# Altium PCB Motor_PCB.PcbDoc
Units mm, origin at the board's own origin, x right, y up, seen from the top; angles counter-clockwise.
Board outline 162.5 x 127.5 mm, 2 copper layers (Top Layer, Bottom Layer), stack 0.372 mm thick; 39 components, 32 nets, 119 pads, 64 vias.
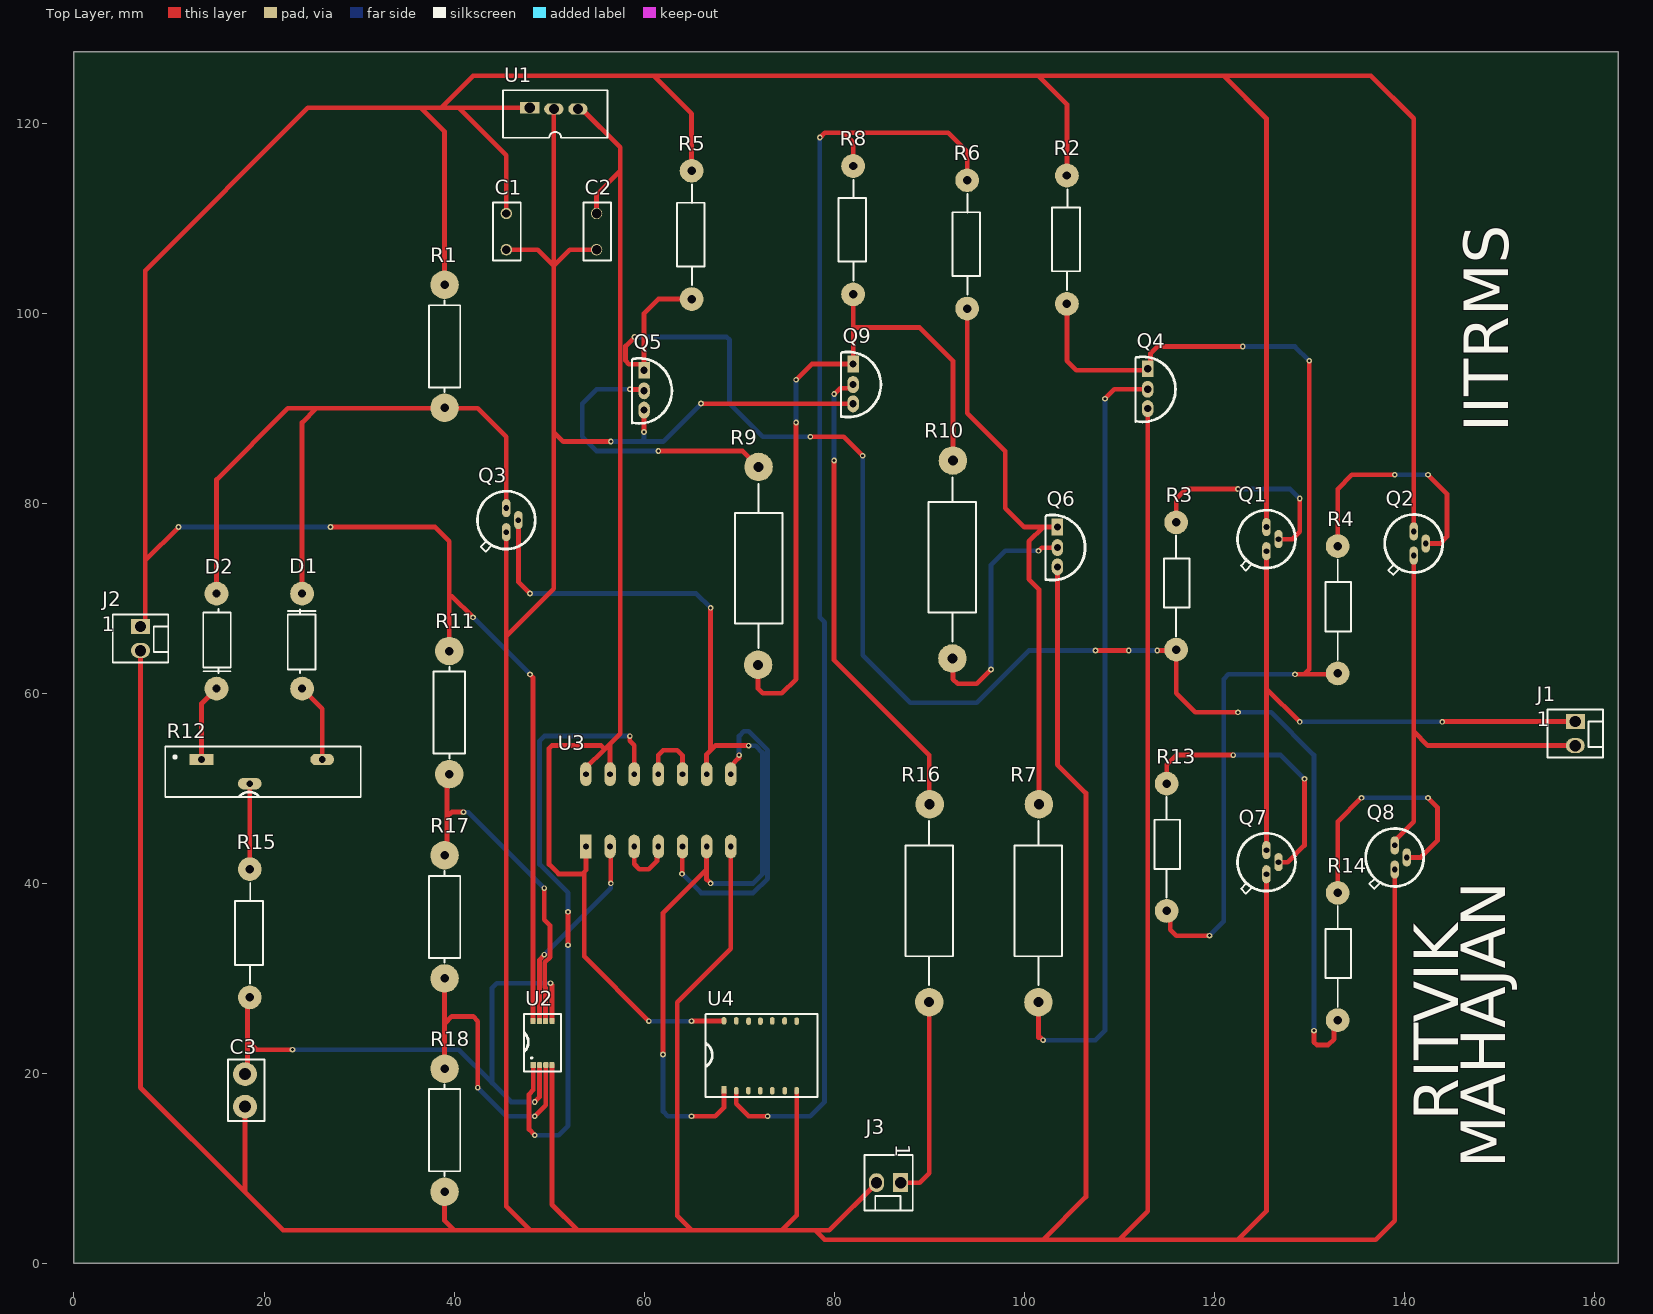
[diagram p0: Top Layer view]
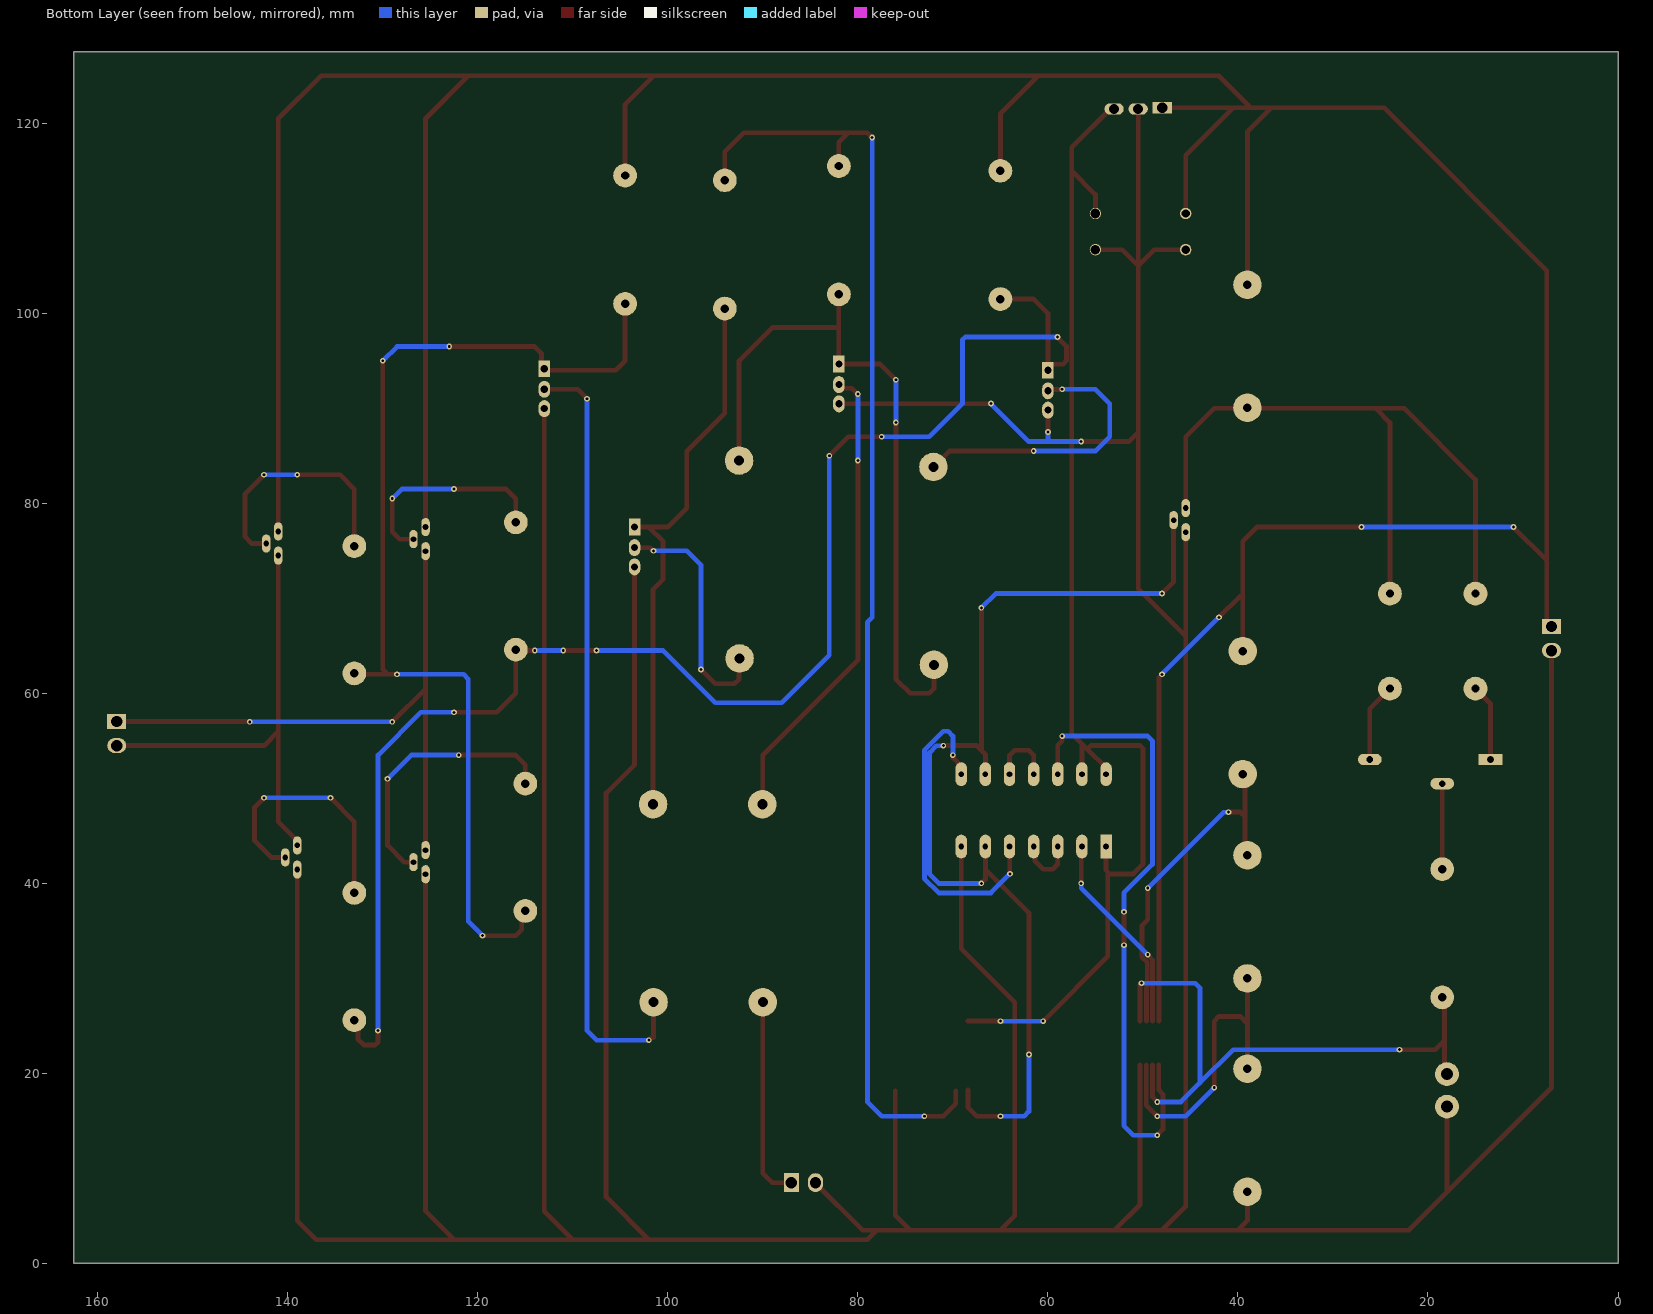
[diagram p1: Bottom Layer view, seen from below]
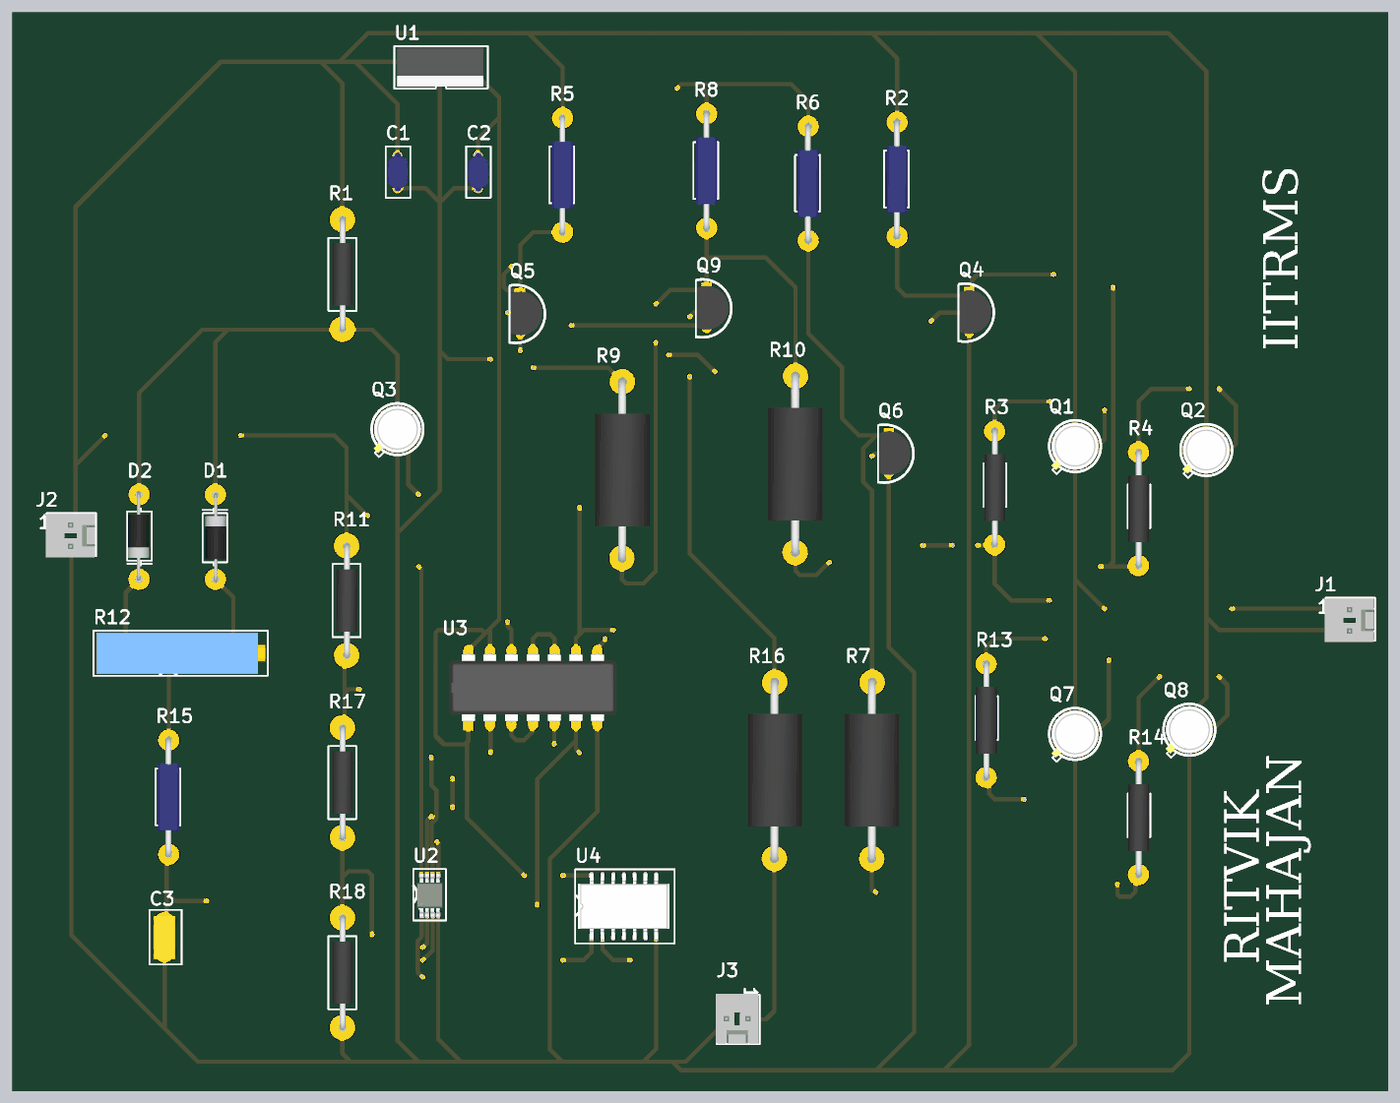
[diagram p2: 3D render of the assembled board from above, using the file's embedded part models]

## Layer stack, top to bottom
Top Solder: solder mask 0.01, Solder Resist, Dk 3.5
Top Layer: signal copper 0.036
Dielectric 1: dielectric 0.3, FR-4, Dk 4.8
Bottom Layer: signal copper 0.036
Bottom Solder: solder mask 0.01, Solder Resist, Dk 3.5

## Board outline
0,0 162.5,0 162.5,127.5 0,127.5

## Design rules (kind name [scope] priority, off if disabled: settings)
Clearance [All] p1: gap=0.05 ignorepadtopadclearanceinfootprint=FALSE
HoleToHoleClearance [All] p1: gap=0.05 allowstackedmicrovias=TRUE
MinimumSolderMaskSliver [All] p1: minsoldermaskwidth=0.05
PolygonConnect [All] p1: connectstyle=Relief reliefconductorwidth=0.254 reliefentries=4 polygonreliefangle="90 Angle" airgapwidth=0.254
RoutingVias [All] p1: holewidth=0.3 width=0.6 viastyle="Through Hole" minholewidth=0.3 minwidth=0.6 maxholewidth=0.3 maxwidth=0.6
SilkToSilkClearance [All] p1: silktosilkclearance=0.05
SilkToSolderMaskClearance [IsPad] p1: minsilkscreentomaskgap=0.03 clearancetoexposedcopper=TRUE
SolderMaskExpansion [All] p1: expansion=0.102 istentingtop=FALSE
Width [All] p1: maxlimit=1 minlimit=0.3 preferedwidth=0.5
26 further rules are at their usual default settings.

## Components (designator, comment, footprint, x,y, rotation, side; value= is the part's Value field where it differs from the comment)
C1 "100uf" 100UF 45.5,110.5 r270 top
C2 "10uf" 10UF 55,106.69 r90 top
C3 "0.1uf" 0.1UF 18,16.5 r90 top
D1 "Diode" DIODE 24,70.5 r270 top
D2 "Diode" DIODE 15,60.5 r90 top
J1 "1x2 Header" HDR1X2 158,57.04 r0 top
J2 "1x2 Header" HDR1X2 7,67.04 r0 top
J3 "1x2 Header" HDR1X2 87,8.5 r270 top
Q1 "BJT" BJT 125.5,77.5 r270 top
Q2 "BJT" BJT 141,77.04 r270 top
Q3 "BJT" BJT 45.5,79.5 r270 top
Q4 "MOSFET" MOSFET 113,94.159 r270 top
Q5 "MOSFET" MOSFET 60,94 r270 top
Q6 "MOSFET" MOSFET 103.5,77.5 r270 top
Q7 "BJT" BJT 125.5,43.5 r270 top
Q8 "BJT" BJT 139,44 r270 top
Q9 "MOSFET" MOSFET 82,94.659 r270 top
R1 "5kr" 5KR 39,90.046 r90 top
R2 "100r" 100R 104.5,101 r90 top
R3 "10kr" 10KR 116,64.6 r90 top
R4 "10kr" 10KR 133,62.1 r90 top
R5 "100r" 100R 65,101.5 r90 top
R6 "100r" 100R 94,100.5 r90 top
R7 "1kr" 1KR 101.5,26.636 r90 top
R8 "100r" 100R 82,102 r90 top
R9 "1kr" 1KR 72.051,84.692 r270 top
R10 "1kr" 1KR 92.449,62.808 r90 top
R11 "5kr" 5KR 39.5,51.5 r90 top
R12 "100kr" POT 13.42,53.167 r0 top
R13 "10kr" 10KR 115,37.1 r90 top
R14 "10kr" 10KR 133,25.6 r90 top
R15 "100r" 100R 18.5,28 r90 top
R16 "1kr" 1KR 90,26.636 r90 top
R17 "5kr" 5KR 39,30 r90 top
R18 "5kr" 5KR 39,7.546 r90 top
U1 "V_Reg" V_REG 47.96,121.627 r0 top
U2 "Comparator" COMP 48.34,20.903 r90 top
U3 "NAND" NAND 53.88,43.88 r90 top
U4 "NOT" NOT 68.409,18.261 r90 top

## Footprints (in the part's own frame and the unit in brackets; to place one, negate y for a bottom-side part, rotate by r counter-clockwise, add the part's x,y. Pads: shape width x height; smd on the part's side, far side on the other; paste and mask are expansions set on the pad)
0.1UF [mm]
  round 2.5 hole 1.27: 1(0,0) 2(3.429,0)
  silkscreen extent -1.52,-2.03 4.95,1.78, body extent -1.26,-1.28 4.56,1.27, height 5.09
1KR [mil]
  round 118.11 hole 42: 1(34,0) 2(854,-2)
  silkscreen extent 105,-98 785,98, body extent 16,-128 874,127, height 255
5KR [mm]
  round 3 hole 0.889: 1(0,0) 2(12.954,0)
  silkscreen extent 1.65,-1.65 11.3,1.65, body extent -0.29,-1.27 13.25,1.21, height 2.48
10KR [mm]
  round 2.5 hole 0.889: 1(0,0) 2(13.4,0)
  silkscreen extent 1.4,-1.4 12,1.27, body extent -0.29,-1.27 13.75,1.21, height 2.48
10UF [mm]
  round 1.2 hole 1.016: 1(0,0) 2(3.81,0)
  silkscreen extent -1.14,-1.52 4.95,1.4, body extent -0.92,-1.27 4.73,1.18, height 4
100R [mm]
  round 2.5 hole 0.889: 1(0,0) 2(13.5,0)
  silkscreen extent 1.45,-1.37 12.04,1.55, body extent -0.32,-1.21 13.83,1.27, height 2.48
100UF [mm]
  round 1.2 hole 0.889: 1(0,0) 2(3.81,0)
  silkscreen extent -1.14,-1.4 4.95,1.52, body extent -0.92,-1.18 4.73,1.27, height 4
BJT [mm]
  oval 1.905x0.889 hole 0.6: 1(0,0) 2(1.27,1.27) 3(2.54,0)
  silkscreen extent -1.78,-3.04 4.57,3.05, body extent -1.52,-2.8 4.08,2.8, height 4.6
COMP [mm]
  rect 0.65x0.55 smd: 1(0,0)
  rrect50% 0.65x0.55 smd: 2(-0.025,-0.66) 3(-0.025,-1.321) 4(-0.025,-1.956) 5(4.597,-1.981) 6(4.597,-1.295) 7(4.597,-0.66) 8(4.597,0.025)
  silkscreen extent -0.71,-2.9 5.36,0.97, body extent -0.27,-2.46 4.79,0.53, height 1.09
DIODE [mm]
  round 2.5 hole 0.87: 1(0,0) 2(10,0)
  silkscreen extent 1.65,-1.5 8.38,1.4, body extent -0.18,-1.2 10.38,1.3, height 2.5
HDR1X2 [mm]
  rect 2x1.6 hole 1.2: 1(0,0)
  oval 2x1.6 hole 1.2: 2(0,-2.54)
  silkscreen extent -2.92,-3.81 2.92,1.27, body extent -3.01,-3.94 2.79,1.14, height 11.71
MOSFET [mil]
  rect 70x47.24 hole 30: 1(0,0)
  oval 70x47.24 hole 30: 2(85,0) 3(165,0)
  silkscreen extent -50,-50 220,115, body extent -31,-43 196,102, height 210
NAND [mm]
  rect 2.5x1.2 hole 0.6: 1(0,0)
  oval 2.5x1.2 hole 0.6: 2(0,-2.54) 3(0,-5.08) 4(0,-7.62) 5(0,-10.16) 6(0,-12.7) 7(0,-15.24) 8(7.62,-15.24) 9(7.62,-12.7) 10(7.62,-10.16) 11(7.62,-7.62) 12(7.62,-5.08) 13(7.62,-2.54) 14(7.62,0)
  body extent -0.13,-17.46 7.75,2.22, height 5.08
NOT [mm]
  rect 0.8x0.5 smd: 1(0,0)
  oval 0.8x0.5 smd: 2(-0.076,-1.295) 3(-0.076,-2.565) 4(-0.076,-3.81) 5(-0.076,-5.08) 6(-0.076,-6.401) 7(-0.076,-7.645) 8(7.239,-7.645) 9(7.264,-6.375) 10(7.264,-5.08) 11(7.239,-3.835) 12(7.239,-2.591) 13(7.264,-1.295) 14(7.264,0)
  silkscreen extent -0.76,-9.83 7.98,1.93, body extent -0.31,-9.23 7.49,1.57, height 1.6
POT [mm]
  rect 2.5x1.2 hole 0.7: 1(0,-0.127)
  oval 2.5x1.2 hole 0.7: 2(5.08,-2.667) 3(12.7,-0.127)
  silkscreen extent -3.81,-4.06 16.76,1.25, body extent -3.43,-3.81 16.51,1.02, height 6.35
V_REG [mil]
  rect 80x47.24 hole 42: 1(0,0)
  oval 80x47.24 hole 42: 2(100,-5) 3(200,-5)
  silkscreen extent -111,-124 323,73, body extent -98,-115 302,65, height 734

## Part data
C1: library part FK22Y5V1A107Z, "CAP CER 100UF 10V Y5V RADIAL", Capacitance=100uF, Case/Package=Radial, Dielectric=Y5V, Manufacturer=TDK, Max Operating Temperature=85°C, Min Operating Temperature=-30°C, Package Quantity=500, Tolerance=80%, Voltage Rating=10V, Category="Ceramic Capacitors", ComponentLink1Description=https://datasheet.ciiva.com/160/leadmlcc-commercial-general-en-160679.pdf?src-supplier=Digi-Key, ComponentLink1URL=https://datasheet.ciiva.com/160/leadmlcc-commercial-general-en-160679.pdf?src-supplier=Digi-Key, Height=8mm, Height - Seated (Max)=0.315inch, Lead Free="Lead Free", Lead Length=7mm, Lead Pitch=5mm, Lead/Base Style=Kinked, Length=0.295inch, Manufacturer Part Number=FK22Y5V1A107Z, Mount="Through Hole", Packaging=Bulk, Radiation Hardening=No, RoHS=Yes, RoHS Compliant=Yes, Series=FK, Supplier 1=Avnet, Supplier Part Number 1=FK22Y5V1A107Z, Termination=Radial, Voltage Rating (DC)=10V, Width=0.157inch
C2: library part FK20X7R1E106MR000, "Cap Ceramic 10uF 25V X7R 20% Radial 5mm 125°C Bulk", Case/Package=Radial, Manufacturer=TDK, Supplier Part Number 1=445-FK20X7R1E106MR000-ND, Category="Ceramic Capacitors", ComponentLink1Description=http://product.tdk.com/en/catalog/datasheets/leadmlcc_commercial_general_en.pdf?src-supplier=Avnet, ComponentLink1URL=http://product.tdk.com/en/catalog/datasheets/leadmlcc_commercial_general_en.pdf?src-supplier=Avnet, Manufacturer Part Number=FK20X7R1E106MR000, Pricing 1="1=0.87000, 10=0.64200, 50=0.51340, 100=0.44010, 500=0.34840, 1000=0.29339, 2500=0.27506, 5000=0.25672 (USD)", Stock 1=500, Supplier 1=DigiKey
C3: library part M39014/01-1553, "Cap Ceramic 0.1uF 50V X7R 10% Radial 5.08mm (0.01%FR) 125°C Bulk", Capacitance=100nF, Case/Package=Radial, Dielectric=X7R, Manufacturer=KEMET, Max Operating Temperature=125°C, Min Operating Temperature=-55°C, Package Quantity=100, Supplier Part Number 1=1001-2186-ND, Tolerance=10%, Voltage Rating=50V, Category="Ceramic Capacitors", ComponentLink1Description=http://components.arrow.com/part/dataview/4268595S5964331N4387?src-supplier=Arrow+Electronics, ComponentLink1URL=http://components.arrow.com/part/dataview/4268595S5964331N4387?src-supplier=Arrow+Electronics, ComponentLink2Description=http://www.kemet.com/docfinder?Partnumber=C052T104K5X5CR&src-supplier=Digi-Key, ComponentLink2URL=http://www.kemet.com/docfinder?Partnumber=C052T104K5X5CR&src-supplier=Digi-Key, Construction=RADIAL, Depth=2.29mm, Failure Rate=0.01%, Features=Military, Height - Seated (Max)=0.2inch, Lead Pitch=0.2inch, Lead/Base Style="Formed Leads", Length=0.19inch, Manufacturer Part Number=M39014/01-1553, Mount="Through Hole", Packaging=Bulk, Pricing 1="1=1.75000, 10=1.38200, 50=1.19780, 100=1.03650, 500=0.78316, 1000=0.69102, 2500=0.64495, 5000=0.62192 (USD)", RoHS=No, RoHS Compliant=No, Series="Military, MIL-PRF-39014, CKR05", Stock 1=21269, Supplier 1=Digi-Key, Width=0.09inch
D1 D2: library part 1N4001G-T, "DIODE GEN PURP 50V 1A DO41", Average Rectified Current=1A, Capacitance=8pF, Case/Package=DO-41, Forward Voltage=1V, Manufacturer=Diodes, Max Operating Temperature=175°C, Max Repetitive Reverse Voltage (Vrrm)=50V, Max Reverse Current=5uA, Max Surge Current=30A, Min Operating Temperature=-65°C, Package Quantity=5000, Supplier Part Number 1=1N4001GDICT-ND, Category="Rectifier Diodes", ComponentLink1Description=https://datasheet.ciiva.com/4453/ds29002-87001-4453648.pdf?src-supplier=Mouser, ComponentLink1URL=https://datasheet.ciiva.com/4453/ds29002-87001-4453648.pdf?src-supplier=Mouser, ComponentLink2Description=https://datasheet.ciiva.com/8301/ds29002-8301703.pdf?src-supplier=Avnet, ComponentLink2URL=https://datasheet.ciiva.com/8301/ds29002-8301703.pdf?src-supplier=Avnet, ComponentLink3Description=https://datasheet.ciiva.com/25947/ds29002-25947001.pdf?src-supplier=Avnet+Europe, ComponentLink3URL=https://datasheet.ciiva.com/25947/ds29002-25947001.pdf?src-supplier=Avnet+Europe, Contact Plating=Tin, Current Rating=1A, Element Configuration=Single, Forward Current=1A, Height=2.72mm, Lead Free="Lead Free", Length=5.21mm, Manufacturer Part Number=1N4001G-T, Max Reverse Voltage (DC)=50V, Mount="Through Hole", Number of Pins=2, Output Current=1A, Packaging="Tape and Reel", Peak Non-Repetitive Surge Current=30A, Polarity=Standard, Pricing 1="1=0.33000, 10=0.27300, 100=0.14480, 500=0.09528, 1000=0.06480, 2000=0.05845 (USD)", Radiation Hardening=No, Recovery Time=2us, Reverse Recovery Time=2us, Reverse Voltage (DC)=50V, RoHS=Yes, RoHS Compliant=Yes, Series=-, Stock 1=29157, Supplier 1=Digi-Key, Voltage Rating (DC)=50V, Weight=0.010582oz, Width=2.72mm
J1 J2 J3: library part 22-29-2021, "Conn Wire to Board HDR 2 POS 2.54mm Solder ST Thru-Hole Bag", Color=White, Flammability Rating="UL94 V-0", Insulation Color=Natural, Manufacturer=Molex, Max Operating Temperature=80°C, Supplier Part Number 1=0022292021, Voltage Rating (DC)=250V, Category="Headers and Wire Housings", ComponentLink1Description=https://datasheet.ciiva.com/70131/022292021-sd-70131706.pdf?src-supplier=Digi-Key, ComponentLink1URL=https://datasheet.ciiva.com/70131/022292021-sd-70131706.pdf?src-supplier=Digi-Key, Connector Type="Header,Male Pin", Contact Material=Brass, Contact Mating Length=0.295inch, Contact Plating=Gold, Contact Post Length=0.14inch, Contact Shape=Square, Fastening Type=Friction, Gender=Male, Glow Wire Compliant=Non-compliant, Halogen Free="Low Halogen", Insulation Height=0.461inch, Insulation Material=Nylon, Lead Free="Lead Free", Manufacturer Part Number=22-29-2021, Mount="Through Hole", Number of Positions=2, Number of Rows=1, Packaging=Bag, Pricing 1="1=0.20078, 10=0.19794, 30=0.19509, 50=0.19224, 100=0.18797, 250=0.18370, 500=0.17942 (USD)", RoHS=Yes, Stock 1=41330, Supplier 1=Avnet, Termination=Solder
Q1 Q2 Q3 Q7 Q8: library part 2N2222A, "TRANS NPN 40V 0.8A TO-18", Case/Package=TO-18, Collector Base Voltage (VCBO)=75V, Collector Emitter Breakdown Voltage=40V, Collector Emitter Saturation Voltage=1V, Emitter Base Voltage (VEBO)=6V, Frequency=250MHz, Manufacturer="Central Semiconductor", Max Collector Current=800mA, Max Frequency=300MHz, Max Operating Temperature=200°C, Max Power Dissipation=500mW, Min Operating Temperature=-65°C, Package Quantity=2000, Power Dissipation=1.2W, Supplier Part Number 1=1514-2N2222APBFREE-ND, Category=BJTs, Collector Emitter Voltage (VCEO)=40V, Collector-emitter Voltage-Max=1V, ComponentLink1Description=https://datasheet.ciiva.com/16286/2n2221a-16286747.pdf?src-supplier=Future+Electronics, ComponentLink1URL=https://datasheet.ciiva.com/16286/2n2221a-16286747.pdf?src-supplier=Future+Electronics, Element Configuration=Single, Gain Bandwidth Product=300MHz, hFE Min=35, Lead Free="Lead Free", Manufacturer Part Number=2N2222A, Mount="Through Hole", Number of Elements=1, Number of Pins=3, Packaging=Bulk, Polarity=NPN, Pricing 1="1=2.48000, 10=2.22500, 25=2.09880, 100=1.78820, 500=1.46916, 1000=1.21730, 2500=1.18800 (USD)", Radiation Hardening=No, RoHS=No, RoHS Compliant=No, Series=-, Stock 1=19427, Supplier 1=Digi-Key, Transition Frequency=300MHz
Q4 Q5 Q6 Q9: library part 2N7000TA, "Trans MOSFET N-CH 60V 0.2A 3-Pin TO-92 Ammo", Case/Package=TO-92-3, Continuous Drain Current (ID)=200mA, Drain to Source Breakdown Voltage=60V, Drain to Source Resistance=1.2R, Gate to Source Voltage (Vgs)=30V, Input Capacitance=50pF, Manufacturer="ON Semiconductor / Fairchild", Max Operating Temperature=150°C, Max Power Dissipation=400mW, Min Operating Temperature=-55°C, On-State Resistance=5R, Package Quantity=2000, Supplier Part Number 1=2N7000TACT-ND, Threshold Voltage=3.9V, Category=MOSFETs, ComponentLink1Description=https://datasheet.ciiva.com/16743/2n7000ta-16743696.pdf?src-supplier=Future+Electronics, ComponentLink1URL=https://datasheet.ciiva.com/16743/2n7000ta-16743696.pdf?src-supplier=Future+Electronics, ComponentLink2Description=https://datasheet.ciiva.com/25625/0900766b80f9a390-25625193.pdf?src-supplier=RSComponents, ComponentLink2URL=https://datasheet.ciiva.com/25625/0900766b80f9a390-25625193.pdf?src-supplier=RSComponents, ComponentLink3Description=https://datasheet.ciiva.com/4440/2n7000bu-8139-4440256.pdf?src-supplier=Mouser, ComponentLink3URL=https://datasheet.ciiva.com/4440/2n7000bu-8139-4440256.pdf?src-supplier=Mouser, ComponentLink4Description=https://datasheet.ciiva.com/46422/1863369-46422102.pdf?src-supplier=Element14, ComponentLink4URL=https://datasheet.ciiva.com/46422/1863369-46422102.pdf?src-supplier=Element14, ComponentLink5Description=https://datasheet.ciiva.com/931/2n7000-931787.pdf?src-supplier=Digi-Key, ComponentLink5URL=https://datasheet.ciiva.com/931/2n7000-931787.pdf?src-supplier=Digi-Key, ComponentLink6Description=https://datasheet.ciiva.com/931/2n7000-931786.pdf?src-supplier=Digi-Key, ComponentLink6URL=https://datasheet.ciiva.com/931/2n7000-931786.pdf?src-supplier=Digi-Key, ComponentLink7Description=https://datasheet.ciiva.com/15208/getdatasheetpartid-157593-15208444.pdf?src-supplier=Verical, ComponentLink7URL=https://datasheet.ciiva.com/15208/getdatasheetpartid-157593-15208444.pdf?src-supplier=Verical, Contact Plating=Copper,Tin,Silver, Current Rating=200mA, Drain to Source Voltage (Vdss)=60V, Element Configuration=Single, Fall Time=10ns, Height=5.33mm, Lead Free="Lead Free", Length=5.2mm, Manufacturer Part Number=2N7000TA, Mount="Through Hole", Number of Elements=1, Number of Pins=3, Packaging="Ammo Pack", Power Dissipation=400mW, Pricing 1="1=0.46000, 10=0.34300, 25=0.30040, 100=0.19430, 500=0.12870, 1000=0.09867 (USD)", Radiation Hardening=No, Rds On Max=5R, REACH SVHC="No SVHC", Rise Time=10ns, RoHS=Yes, Stock 1=145929, Supplier 1=Digi-Key, Turn-Off Delay Time=10ns, Turn-On Delay Time=10ns, Voltage Rating (DC)=60V, Width=4.19mm
R1 R11 R17 R18: library part RN55D5001FB14, "Metal Film Resistors - Through Hole 1/8watt 5Kohms 1% 100ppm Non Std", Case/Package=Axial, Manufacturer="Vishay Dale", Max Operating Temperature=175°C, Max Power Dissipation=125mW, Min Operating Temperature=-65°C, Package Quantity=100, Resistance=5kR, Resistance Tolerance=1%, Resistor Type="Metal Film", Supplier Part Number 1=RN55D5001FB14-ND, Temperature Coefficient=100ppm/°C, Voltage Rating=250V, Category="Through-Hole Resistors", ComponentLink1Description=https://datasheet.ciiva.com/22672/1847593-22672521.pdf?src-supplier=Element14, ComponentLink1URL=https://datasheet.ciiva.com/22672/1847593-22672521.pdf?src-supplier=Element14, ComponentLink2Description=https://datasheet.ciiva.com/5491/cmfmil-223788-5491847.pdf?src-supplier=Mouser, ComponentLink2URL=https://datasheet.ciiva.com/5491/cmfmil-223788-5491847.pdf?src-supplier=Mouser, ComponentLink3Description=https://datasheet.ciiva.com/13956/cmfmil-13956108.pdf?src-supplier=Digi-Key, ComponentLink3URL=https://datasheet.ciiva.com/13956/cmfmil-13956108.pdf?src-supplier=Digi-Key, Features="Moisture Resistant,Military,Flame Retardant Coating", Lead Diameter=0.64mm, Lead Free="Contains Lead", Length=0.24inch, Manufacturer Part Number=RN55D5001FB14, Number of Pins=2, Number of Terminations=2, Packaging=Bulk, Power Rating=125mW, Pricing 1="1=0.58000, 10=0.44800, 25=0.34120, 50=0.25360, 100=0.18850, 250=0.15924, 500=0.13650, 1000=0.10400, 5000=0.08775 (USD)", REACH SVHC=Unknown, RoHS=No, RoHS Compliant=No, Series="Military, MIL-R-10509/7, RN55", Stock 1=711, Supplier 1=Digi-Key, Termination=Axial, Tolerance=1%, Voltage Rating (DC)=250V, Width=2.29mm
R2 R5 R6 R8 R15: library part CPF1100R00JKEE6, "RESISTOR METAL FILM 1W 100 OHM", Case/Package=Axial, Manufacturer="Vishay Dale", Max Operating Temperature=230°C, Max Power Dissipation=1W, Min Operating Temperature=-65°C, Package Quantity=1, Resistance=100R, Resistor Type="Metal Film", Supplier Part Number 1=CPF100DCT-ND, Temperature Coefficient=100ppm/°C, Tolerance=5%, Category="Through-Hole Resistors", ComponentLink1Description=https://datasheet.ciiva.com/2718/cpf-2718963.pdf?src-supplier=Digi-Key, ComponentLink1URL=https://datasheet.ciiva.com/2718/cpf-2718963.pdf?src-supplier=Digi-Key, ComponentLink2Description=https://datasheet.ciiva.com/2718/cpf-2718964.pdf?src-supplier=Digi-Key, ComponentLink2URL=https://datasheet.ciiva.com/2718/cpf-2718964.pdf?src-supplier=Digi-Key, Features="Moisture Resistant", Length=0.24inch, Manufacturer Part Number=CPF1100R00JKEE6, Number of Terminations=2, Packaging="Tape and Reel", Pricing 1="1=0.69000, 10=0.57400, 25=0.49200, 50=0.44280, 100=0.38540, 250=0.34440, 500=0.27880 (USD)", RoHS=Yes, RoHS Compliant=Yes, Series=CPF, Stock 1=368, Supplier 1=Digi-Key
R3 R4 R13 R14: library part CPF110K000FKEE6, "RESISTOR METAL FILM 1W 10.0K OHM", Case/Package=Axial, Manufacturer="Vishay Dale", Max Operating Temperature=230°C, Max Power Dissipation=1W, Min Operating Temperature=-65°C, Package Quantity=1, Resistance=10kR, Resistor Type="Metal Film", Supplier Part Number 1=CPF10.0KCCT-ND, Temperature Coefficient=100ppm/°C, Tolerance=1%, Voltage Rating=250V, Category="Through-Hole Resistors", ComponentLink1Description=https://datasheet.ciiva.com/2725/cpf-2725244.pdf?src-supplier=Digi-Key, ComponentLink1URL=https://datasheet.ciiva.com/2725/cpf-2725244.pdf?src-supplier=Digi-Key, ComponentLink2Description=https://datasheet.ciiva.com/2725/cpf-2725245.pdf?src-supplier=Digi-Key, ComponentLink2URL=https://datasheet.ciiva.com/2725/cpf-2725245.pdf?src-supplier=Digi-Key, Features="Moisture Resistant", Lead Diameter=0.64mm, Length=0.24inch, Manufacturer Part Number=CPF110K000FKEE6, Mount="Through Hole", Number of Terminations=2, Packaging="Tape and Reel", Power Rating=1W, Pricing 1="1=0.72000, 10=0.60200, 25=0.51600, 50=0.46440, 100=0.40420, 250=0.36120, 500=0.29240 (USD)", RoHS=Yes, RoHS Compliant=Yes, Series=CPF, Stock 1=37314, Supplier 1=Digi-Key, Termination=Axial
R7 R9 R10 R16: library part MR1061K0000TAE66, "RESISTOR 1.0K OHM 1/4W .01% WW", Case/Package=Axial, Manufacturer="Vishay Dale", Max Operating Temperature=145°C, Max Power Dissipation=250mW, Min Operating Temperature=-55°C, Package Quantity=5, Resistance=1kR, Resistor Type=Wirewound, Supplier Part Number 1=MR106-1K-.01-ND, Temperature Coefficient=10ppm/°C, Tolerance=0.01%, Category="Through-Hole Resistors", ComponentLink1Description=https://datasheet.ciiva.com/6494/mr100-6494940.pdf?src-supplier=Digi-Key, ComponentLink1URL=https://datasheet.ciiva.com/6494/mr100-6494940.pdf?src-supplier=Digi-Key, Length=0.5inch, Manufacturer Part Number=MR1061K0000TAE66, Number of Terminations=2, Packaging=Bulk, Pricing 1="1=6.60000, 10=6.18800, 25=5.77520, 50=5.08760, 100=4.40000 (USD)", RoHS=Yes, RoHS Compliant=Yes, Series=MR100, Stock 1=105, Supplier 1=Digi-Key
R12: library part 89PR100KLF, "TRIMMER 100K OHM 0.75W PC PIN", Manufacturer="TT BI", Max Operating Temperature=125°C, Max Power Dissipation=750mW, Min Operating Temperature=-55°C, Package Quantity=100, Resistance=100kR, Resistance Tolerance=10%, Resistor Type=Cermet, Supplier Part Number 1=987-1158-ND, Temperature Coefficient=100ppm/°C, Voltage Rating (DC)=200V, Category="Variable Resistors and Potentiometers", ComponentLink1Description=http://www.farnell.com/datasheets/1910176.pdf?src-supplier=Farnell, ComponentLink1URL=http://www.farnell.com/datasheets/1910176.pdf?src-supplier=Farnell, ComponentLink2Description=http://www.mouser.com/ds/2/414/89-9791.pdf?src-supplier=Mouser, ComponentLink2URL=http://www.mouser.com/ds/2/414/89-9791.pdf?src-supplier=Mouser, ComponentLink3Description=http://components.arrow.com/part/dataview/0323_03829868?src-supplier=Arrow+Europe, ComponentLink3URL=http://components.arrow.com/part/dataview/0323_03829868?src-supplier=Arrow+Europe, ComponentLink4Description=http://www.bitechnologies.com/pdfs/89.pdf?src-supplier=Future+Electronics, ComponentLink4URL=http://www.bitechnologies.com/pdfs/89.pdf?src-supplier=Future+Electronics, ComponentLink5Description=http://www.ttelectronics.com/sites/default/files/download-files/Datasheet_MultiTurn%20Trimmer_89%20and%2090.pdf?src-supplier=Digi-Key, ComponentLink5URL=http://www.ttelectronics.com/sites/default/files/download-files/Datasheet_MultiTurn%20Trimmer_89%20and%2090.pdf?src-supplier=Digi-Key, ComponentLink6Description=https://www.verical.com/server-webapp/html/getDatasheet?partID=122944&src-supplier=Verical, ComponentLink6URL=https://www.verical.com/server-webapp/html/getDatasheet?partID=122944&src-supplier=Verical, ComponentLink7Description=http://www.farnell.com/datasheets/1910176.pdf?src-supplier=Element14, ComponentLink7URL=http://www.farnell.com/datasheets/1910176.pdf?src-supplier=Element14, ComponentLink8Description=http://components.arrow.com/part/dataview/42291488S7454187N1290?src-supplier=Arrow+Electronics, ComponentLink8URL=http://components.arrow.com/part/dataview/42291488S7454187N1290?src-supplier=Arrow+Electronics, Depth=4.83mm, Height=0.25inch, Lead Free="Lead Free", Length=20.57mm, Manufacturer Part Number=89PR100KLF, Military Standard=Not, Mount="Through Hole", Number of Turns=20, Packaging=Bulk, Power Rating=750mW, Pricing 1="1=1.75000, 10=1.53700, 25=1.37800, 50=1.32500, 100=1.27200, 250=1.21900, 500=1.00700, 1000=0.95400, 5000=0.79500 (USD)", Radiation Hardening=No, REACH SVHC="No SVHC", RoHS=Yes, RoHS Compliant=Yes, Series=89, Stock 1=1116, Supplier 1=Digi-Key, Taper=Linear, Technology=CERMET, Termination=Pin, Tolerance=10%, Type=Potentiometer, Weight=1.4g
U1: library part LM340T-5.0, "IC REG LINEAR 5V 1A TO220-3", Case/Package=TO-220, Current Rating=1A, Dropout Voltage=2V, Manufacturer="TI National Semiconductor", Max Input Voltage=35V, Max Operating Temperature=125°C, Max Output Voltage=5V, Min Input Voltage=7.5V, Min Operating Temperature=0°C, Output Voltage Accuracy=2%, Power Supply Rejection Ratio (PSRR)=80dB, Quiescent Current=8mA, Supplier Part Number 1=296-39011-5-ND, Accuracy=2%, Category="Voltage Regulators - Linear", ComponentLink1Description=https://datasheet.ciiva.com/26904/lm340t-5-0-26904953.pdf?src-supplier=IIIC, ComponentLink1URL=https://datasheet.ciiva.com/26904/lm340t-5-0-26904953.pdf?src-supplier=IIIC, ComponentLink2Description=https://datasheet.ciiva.com/1512/1888853-1512093.pdf?src-supplier=Element14, ComponentLink2URL=https://datasheet.ciiva.com/1512/1888853-1512093.pdf?src-supplier=Element14, Contact Plating=Tin,Lead, Height=8.89mm, Lead Free="Contains Lead", Length=10.16mm, Manufacturer Part Number=LM340T-5.0, Max Output Current=1A, Mount="Through Hole", Nominal Output Voltage=5V, Number of Outputs=1, Number of Pins=3, Number of Regulators=1, Output Current=1A, Output Type=Fixed, Output Voltage=5V, Packaging=Rail/Tube, Polarity=Positive, Pricing 1="1=2.34000, 10=2.10400, 25=1.98480, 100=1.69110, 250=1.58788, 500=1.38940, 1000=1.31075 (USD)", REACH SVHC="No SVHC", RoHS=No, RoHS Compliant=No, Series=-, Stock 1=1404, Supplier 1=Digi-Key, Weight=0.08113oz, Width=4.7mm
U2: library part LM2903DMR2G, "Comparator Dual ±18V/36V 8-Pin Micro T/R", Case/Package=MSOP, Input Bias Current=250nA, Input Offset Voltage (Vos)=7mV, Manufacturer="ON Semiconductor", Max Dual Supply Voltage=18V, Max Operating Temperature=105°C, Max Power Dissipation=570mW, Max Supply Current=1mA, Max Supply Voltage=36V, Min Dual Supply Voltage=1V, Min Operating Temperature=-40°C, Min Supply Voltage=2V, Output Current=16mA, Package Quantity=4000, Quiescent Current=2.5mA, Supplier Part Number 1=7878241, Voltage Gain=106.02dB, Category=Comparators, ComponentLink1Description=https://datasheet.ciiva.com/30481/0900766b8124fc18-30481577.pdf?src-supplier=RSComponents, ComponentLink1URL=https://datasheet.ciiva.com/30481/0900766b8124fc18-30481577.pdf?src-supplier=RSComponents, ComponentLink2Description=https://datasheet.ciiva.com/1575/65410-1575986.pdf?src-supplier=Newark, ComponentLink2URL=https://datasheet.ciiva.com/1575/65410-1575986.pdf?src-supplier=Newark, ComponentLink3Description=https://datasheet.ciiva.com/1827/lm393-d-1827303.pdf?src-supplier=Digi-Key, ComponentLink3URL=https://datasheet.ciiva.com/1827/lm393-d-1827303.pdf?src-supplier=Digi-Key, ComponentLink4Description=https://datasheet.ciiva.com/2971/lm393-d-2971751.pdf?src-supplier=Avnet, ComponentLink4URL=https://datasheet.ciiva.com/2971/lm393-d-2971751.pdf?src-supplier=Avnet, ComponentLink5Description=https://datasheet.ciiva.com/26911/getdatasheetpartid-295472-26911255.pdf?src-supplier=Verical, ComponentLink5URL=https://datasheet.ciiva.com/26911/getdatasheetpartid-295472-26911255.pdf?src-supplier=Verical, ComponentLink6Description=https://datasheet.ciiva.com/1827/lm393-d-1827304.pdf?src-supplier=Digi-Key, ComponentLink6URL=https://datasheet.ciiva.com/1827/lm393-d-1827304.pdf?src-supplier=Digi-Key, ComponentLink7Description=https://datasheet.ciiva.com/26211/lm393-d-26211112.pdf?src-supplier=Avnet+Europe, ComponentLink7URL=https://datasheet.ciiva.com/26211/lm393-d-26211112.pdf?src-supplier=Avnet+Europe, ComponentLink8Description=https://datasheet.ciiva.com/1827/lm393-d-1827305.pdf?src-supplier=Digi-Key, ComponentLink8URL=https://datasheet.ciiva.com/1827/lm393-d-1827305.pdf?src-supplier=Digi-Key, ComponentLink9Description=https://datasheet.ciiva.com/16464/lm393-d-16464266.pdf?src-supplier=Avnet+Asia, ComponentLink9URL=https://datasheet.ciiva.com/16464/lm393-d-16464266.pdf?src-supplier=Avnet+Asia, ComponentLink10Description=https://datasheet.ciiva.com/2970/lm393-d-2970811.pdf?src-supplier=Avnet, ComponentLink10URL=https://datasheet.ciiva.com/2970/lm393-d-2970811.pdf?src-supplier=Avnet, Contact Plating=Tin,Matte, Halogen Free="Halogen Free", Height=0.95mm, Lead Free="Lead Free", Length=3.1mm, Manufacturer Part Number=LM2903DMR2G, Max Input Current=250nA, Nominal Supply Current=1mA, Number of Channels=2, Number of Elements=2, Number of Pins=8, Output Compatibility=CMOS, Output Current per Channel=16mA, Output Type=TTL, Packaging="Tape and Reel", Power Dissipation=570mW, Radiation Hardening=No, REACH SVHC="No SVHC", Response Time=1.5us, RoHS=Yes, RoHS Compliant=Yes, Series=LM2903, Stock 1=2960, Supplier 1=RSComponents, Supply Current=1mA, Technology=BIPOLAR, Type="General Purpose", Width=3.1mm
U3: library part SN74AS1000AN, "NAND Gate 4-Element 2-IN Bipolar 14-Pin PDIP Tube", Case/Package=PDIP, High Level Output Current=-48mA, Low Level Output Current=48mA, Manufacturer="Texas Instruments", Max Operating Temperature=70°C, Max Supply Voltage=5.5V, Min Operating Temperature=0°C, Min Supply Voltage=4.5V, Operating Supply Voltage=5V, Package Quantity=25, Supplier Part Number 1=296-33786-5-ND, Category="Logic Gates", ComponentLink1Description=https://datasheet.ciiva.com/41457/001016459-da-01-en-ic-gate-qua-2in-sn74as1000an-pdip-14-tid-41457041.pdf?src-supplier=Conrad, ComponentLink1URL=https://datasheet.ciiva.com/41457/001016459-da-01-en-ic-gate-qua-2in-sn74as1000an-pdip-14-tid-41457041.pdf?src-supplier=Conrad, ComponentLink2Description=https://datasheet.ciiva.com/26262/sn74as1000a-26262535.pdf?src-supplier=Avnet+Europe, ComponentLink2URL=https://datasheet.ciiva.com/26262/sn74as1000a-26262535.pdf?src-supplier=Avnet+Europe, ComponentLink3Description=https://datasheet.ciiva.com/14292/sn74as1000a-14292252.pdf?src-supplier=Avnet, ComponentLink3URL=https://datasheet.ciiva.com/14292/sn74as1000a-14292252.pdf?src-supplier=Avnet, Lead Free="Lead Free", Logic Function="NAND GATE", Manufacturer Part Number=SN74AS1000AN, Max Output Current=48mA, Mount="Through Hole", Number of Bits=4, Number of Circuits=4, Number of Elements=4, Number of Gates=4, Number of Input Lines=2, Number of Inputs=2, Number of Output Lines=1, Number of Outputs=1, Number of Pins=14, Output Current=48mA, Packaging=Rail/Tube, Pricing 1="1=3.31000, 10=2.97400, 25=2.81200, 100=2.43700, 250=2.31200, 500=2.07456, 1000=2.06325 (USD)", Propagation Delay=4ns, Radiation Hardening=No, REACH SVHC="No SVHC", RoHS=Yes, RoHS Compliant=Yes, Stock 1=98, Supplier 1=Digi-Key, Termination="Through Hole", Turn-On Delay Time=4ns, Weight=0.032734oz
U4: library part TC74AC14F(EL,F), "Inverter Schmitt Trigger 6-Element CMOS 14-Pin SOP T/R", Case/Package=SOP, High Level Output Current=-24mA, Low Level Output Current=24mA, Manufacturer=Toshiba, Max Operating Temperature=85°C, Min Operating Temperature=-40°C, Supplier Part Number 1=TC74AC14F(ELF)CT-ND, Category="Logic Gates", ComponentLink1Description=http://www.semicon.toshiba.com.cn/info/docget.jsp?pid=TC74AC14P&lang=en&type=datasheet&src-supplier=Avnet, ComponentLink1URL=http://www.semicon.toshiba.com.cn/info/docget.jsp?pid=TC74AC14P&lang=en&type=datasheet&src-supplier=Avnet, Logic Function="Schmitt Trigger,Inverter", Manufacturer Part Number=TC74AC14F(EL,F), Pricing 1="1=0.62000 (USD)", Radiation Hardening=No, RoHS=Yes, RoHS Compliant=Yes, Stock 1=1, Supplier 1=Digi-Key

## Via types
v1: diameter 0.6, hole 0.3, Top Layer to Bottom Layer, 64 vias

## Nets (pads, with @x,y where several pads share a name; then routed paths per layer and width w, separated by ;. In a path a pad name is that pad's centre, name@x,y a point inside that pad or via, vN(x,y) a via of type N, cw(c..) or ccw(c..) an arc to the next point about the centre after c; other vN are vias at no path point)
GND: C1.2 C2.1 C3.1 J2.2 J3.2 Q3.3 Q4.3 Q5.3 Q6.3 Q7.3 Q8.3 Q9.3 R18.1 U1.2 U2.4 U3.7 U4.7 | length 703.9
  Top Layer w0.5: J2.2 7,18.5 18,7.5 ; C3.1 18,7.5 ; R18.1 39,4.5 40,3.5 ; Q3.3 45.5,66 ; C1.2 48.81,106.69 50.5,105 ; U2.4 50.295,6.205 53,3.5 ; U1.2 50.5,105 ; C2.1 52.19,106.69 50.5,105 ; v1(56.5,86.5) 51.5,86.5 50.5,87.5 ; v1(60,87.5) Q5.3 ; v1(66,90.5) 66.016,90.484 81.984,90.484 Q9.3 ; U3.7 69.12,33.12 63.5,27.5 63.5,5 65,3.5 ; U4.7 76.055,5.055 74.5,3.5 ; J3.2 84.46,8.46 79.5,3.5 78,3.5 ; Q6.3 103.5,52.5 106.5,49.5 106.5,7 102,2.5 ; Q4.3 113,5.5 110,2.5 ; Q7.3 125.5,5.5 122.5,2.5 ; Q8.3 139,4.5 137,2.5 122.5,2.5 ; 18,7.5 22,3.5 40,3.5 ; 40,3.5 48,3.5 ; 45.5,66 45.5,6 48,3.5 ; 45.5,66 50.5,71 50.5,87.5 ; 48,3.5 53,3.5 ; 50.5,87.5 50.5,105 ; 53,3.5 65,3.5 ; 65,3.5 74.5,3.5 ; 74.5,3.5 78,3.5 ; 78,3.5 79,2.5 102,2.5 ; 102,2.5 110,2.5 ; 110,2.5 122.5,2.5
  Bottom Layer w0.5: v1(56.5,86.5) 59.707,86.5 ; v1(60,87.5) 60,86.793 59.707,86.5 ; v1(66,90.5) 62,86.5 59.707,86.5
NetC2_2: C2.2 U1.3 U3.1 U3.13 U3.14 U4.14 | length 134
  Top Layer w0.5: U1.3 53.456,121.5 57.5,117.456 57.5,115 ; U3.1 53.88,41.38 53.69,41.19 ; U3.14 53.88,52.15 55.865,54.135 ; C2.2 55,112.5 57.5,115 ; U3.13 56.42,54.58 56.365,54.635 ; v1(60.5,25.5) 53.69,32.31 53.69,41.19 ; v1(65,25.5) 65.013,25.513 68.409,25.513 U4.14 ; 53.69,41.19 53.5,41 51,41 50,42 50,54.207 50.293,54.5 55.5,54.5 55.865,54.135 ; 55.865,54.135 56.365,54.635 ; 56.365,54.635 57.5,55.77 57.5,115
  Bottom Layer w0.5: v1(60.5,25.5) v1(65,25.5)
NetC3_2: C3.2 R15.1 U2.2 U2.5 | length 65.7
  Top Layer w0.5: C3.2 18.25,20.179 18.25,23.5 ; R15.1 18.25,27.75 18.25,23.5 ; v1(23,22.5) 19.25,22.5 18.25,23.5 ; v1(48.5,17) 48.5,17.027 49,17.527 U2.2 ; v1(50.15,29.5) 50.15,29.473 50.321,29.302 U2.5
  Bottom Layer w0.5: v1(23,22.5) 40.5,22.5 44,19 ; v1(48.5,17) 46,17 44,19 ; v1(50.15,29.5) 44.5,29.5 44,29 44,19
NetD1_1: D1.1 D2.2 Q3.1 R1.1 | length 74.5
  Top Layer w0.5: D2.2 15,82.5 22.5,90 25.5,90 ; D1.1 24,88.5 25.5,90 ; Q3.1 45.5,87 42.5,90 39.046,90 R1.1 38.954,90 25.5,90
NetD1_2: D1.2 R12.3 | length 8.3
  Top Layer w0.5: D1.2 26.12,58.38 R12.3
NetD2_1: D2.1 R12.1 | length 8.1
  Top Layer w0.5: R12.1 13.42,58.92 D2.1
NetJ1_1: J1.1 Q1.3 Q7.1 | length 65.4
  Top Layer w0.5: Q7.1 125.5,60.5 ; Q1.3 125.5,60.5 ; v1(129,57) 125.5,60.5 ; v1(144,57) 144.027,57 144.067,57.04 J1.1
  Bottom Layer w0.5: v1(129,57) v1(144,57)
NetJ1_2: J1.2 Q2.3 Q8.1 | length 48.9
  Top Layer w0.5: Q8.1 139,44.508 141,46.508 141,56 ; Q2.3 141,56 ; J1.2 142.5,54.5 141,56
NetQ1_2: Q1.2 R3.2 | length 22.4
  Top Layer w0.5: R3.2 116,80.5 117,81.5 v1(122.5,81.5) ; Q1.2 128.23,76.23 129,77 v1(129,80.5)
  Bottom Layer w0.5: v1(122.5,81.5) 128,81.5 v1(129,80.5)
NetQ2_2: Q2.2 R4.2 | length 26
  Top Layer w0.5: R4.2 133,81.5 134.5,83 v1(139,83) ; Q2.2 143.77,75.77 144.5,76.5 144.5,81 v1(142.5,83)
  Bottom Layer w0.5: v1(139,83) v1(142.5,83)
NetQ3_2: Q3.2 U3.6 U3.9 U4.1 | length 110.5
  Top Layer w0.5: Q3.2 46.77,71.73 v1(48,70.5) ; v1(62,22) 62,36.92 66.58,41.5 ; v1(65,15.5) 67.5,15.5 68.409,16.409 U4.1 ; U3.6 66.58,41.5 ; U3.9 66.58,53.58 67,54 ; v1(67,40) 66.58,40.42 66.58,41.5 ; v1(67,69) 67,54 ; v1(71,54.5) 67.5,54.5 67,54
  Bottom Layer w0.5: v1(48,70.5) 65.5,70.5 v1(67,69) ; v1(62,22) 62,16 62.5,15.5 v1(65,15.5) ; v1(67,40) 71.5,40 72.45,40.95 72.45,53.772 71.741,54.481 71.019,54.481 v1(71,54.5)
NetQ4_1: Q4.1 R2.1 R4.1 R13.1 | length 113.9
  Top Layer w0.5: R2.1 104.5,95 105.5,94 112.841,94 Q4.1 113.298,94.457 113.298,95.798 114,96.5 v1(123,96.5) ; R13.1 115.383,36.717 115.383,35.117 116,34.5 v1(119.5,34.5) ; v1(128.5,62) 128.519,62.019 129.5,62.019 ; v1(130,95) 130,62.519 129.5,62.019 ; R4.1 132.919,62.019 129.5,62.019
  Bottom Layer w0.5: v1(119.5,34.5) 121,36 121,61.5 121.5,62 v1(128.5,62) ; v1(123,96.5) 128.5,96.5 v1(130,95)
NetQ4_2: Q4.2 R7.1 | length 82.7
  Top Layer w0.5: R7.1 101.5,23.793 101.68,23.793 101.973,23.5 v1(102,23.5) ; v1(108.5,91) 109.5,92 Q4.2
  Bottom Layer w0.5: v1(102,23.5) 107.5,23.5 108.5,24.5 v1(108.5,91)
NetQ5_1: Q5.1 R3.1 R5.1 R14.1 | length 164.9
  Top Layer w0.5: v1(59,97.5) 58.05,96.55 58.05,95 58.411,94.639 59.65,94.639 Q5.1@60,94.289 ; Q5.1 Q5.1@60,94.289 ; R5.1 61.5,101.5 60,100 Q5.1@60,94.289 ; v1(77.5,87) 81,87 v1(83,85) ; v1(107.5,64.5) v1(111,64.5) ; v1(114,64.5) 114.019,64.519 115.919,64.519 R3.1 116,60 118,58 v1(122.5,58) ; v1(130.5,24.5) 130.5,23.293 130.793,23 132,23 132.617,23.617 132.617,25.217 R14.1
  Bottom Layer w0.5: v1(59,97.5) 68.707,97.5 69,97.207 69,90.5 72.5,87 v1(77.5,87) ; v1(83,85) 83,64 88,59 95,59 100.5,64.5 v1(107.5,64.5) ; v1(111,64.5) v1(114,64.5) ; v1(122.5,58) 126,58 130.5,53.5 v1(130.5,24.5)
NetQ5_2: Q5.2 R9.1 | length 30.6
  Top Layer w0.5: v1(58.5,92) 58.519,91.981 59.86,91.981 Q5.2 ; v1(61.5,85.5) 70.379,85.5 R9.1
  Bottom Layer w0.5: v1(58.5,92) 55,92 53.5,90.5 53.5,87 55,85.5 v1(61.5,85.5)
NetQ6_1: Q6.1 R6.1 R7.2 | length 59.2
  Top Layer w0.5: R6.1 94,89.5 98,85.5 98,79.5 100,77.5 102,77.5 ; R7.2 101.551,70.949 100.5,72 100.5,76 102,77.5 ; Q6.1 102,77.5
NetQ6_2: Q6.2 R10.1 | length 25.8
  Top Layer w0.5: R10.1 92.5,63.621 92.5,61.5 93,61 95,61 96,62 v1(96.5,62.5) ; v1(101.5,75) 101.523,75 101.843,75.32 103.479,75.32 Q6.2
  Bottom Layer w0.5: v1(96.5,62.5) 96.5,73.5 98,75 v1(101.5,75)
NetQ7_2: Q7.2 R13.2 | length 28.4
  Top Layer w0.5: R13.2 115,52.5 116,53.5 v1(122,53.5) ; Q7.2 127.73,42.23 129.5,44 v1(129.5,51)
  Bottom Layer w0.5: v1(122,53.5) 127,53.5 v1(129.5,51)
NetQ8_2: Q8.2 R14.2 | length 26.9
  Top Layer w0.5: R14.2 133,46.5 v1(135.5,49) ; Q8.2 141.73,42.73 143.5,44.5 143.5,48 v1(142.5,49)
  Bottom Layer w0.5: v1(135.5,49) v1(142.5,49)
NetQ9_1: Q9.1 R8.1 R9.2 R10.2 | length 75.3
  Top Layer w0.5: R9.2 72,60.5 72.5,60 74.5,60 76,61.5 v1(76,88.5) ; v1(76,93) 77.659,94.659 Q9.1 82,98.5 ; R8.1 82,98.5 ; R10.2 92.5,95 89,98.5 82,98.5
  Bottom Layer w0.5: v1(76,88.5) v1(76,93)
NetQ9_2: Q9.2 R16.2 | length 49.8
  Top Layer w0.5: v1(80,84.5) 80,63.5 90,53.5 90,48.379 R16.2 ; v1(80,91.5) 80.027,91.5 80.65,92.123 81.677,92.123 82,92.446 Q9.2
  Bottom Layer w0.5: v1(80,84.5) v1(80,91.5)
NetR6_2: R6.2 R8.2 U4.2 | length 137
  Top Layer w0.5: U4.2 69.705,16.795 71,15.5 v1(73,15.5) ; v1(78.5,118.5) 78.527,118.5 79.027,119 81,119 ; R8.2 82,118 81,119 ; R6.2 94,117 92,119 81,119
  Bottom Layer w0.5: v1(73,15.5) 77.5,15.5 79,17 79,67.486 78.5,67.986 v1(78.5,118.5)
NetR11_1: R11.1 R17.2 U2.6 | length 37
  Top Layer w0.5: R17.2 39.25,43.204 39.25,47 ; R11.1 39.25,51.25 39.25,47 ; v1(41,47.5) 39.75,47.5 39.25,47 ; v1(49.5,39.5) 49.5,36.162 50.1,35.562 50.1,32.251 49.55,31.701 49.55,29.101 49.635,29.016 U2.6
  Bottom Layer w0.5: v1(41,47.5) 41.019,47.481 41.519,47.481 v1(49.5,39.5)
NetR12_2: R12.2 R15.2 | length 9
  Top Layer w0.5: R15.2 R12.2
NetR17_1: R17.1 R18.2 U2.3 | length 33.6
  Top Layer w0.5: R18.2 39,25.25 ; R17.1 39,25.25 ; v1(42.5,18.5) 42.5,25.5 42,26 39.75,26 39,25.25 ; v1(48.5,15.5) 49.66,16.66 U2.3
  Bottom Layer w0.5: v1(42.5,18.5) 45.5,15.5 v1(48.5,15.5)
NetU2_1: U2.1 U3.12 | length 67.4
  Top Layer w0.5: U2.1 48.34,18.259 47.9,17.82 47.9,14.1 v1(48.5,13.5) ; v1(52,33.5) v1(52,37) ; v1(58.5,55.5) 58.5,55 58.96,54.54 U3.12
  Bottom Layer w0.5: v1(48.5,13.5) 51,13.5 52,14.5 v1(52,33.5) ; v1(52,37) 52,39 49,42 49,55 49.5,55.5 v1(58.5,55.5)
NetU2_7: U2.7 U3.2 | length 21.5
  Top Layer w0.5: U2.7 49,31.973 49.5,32.473 v1(49.5,32.5) ; U3.2 56.481,43.819 56.481,40.019 v1(56.5,40)
  Bottom Layer w0.5: v1(49.5,32.5) 56.481,39.481 56.481,39.981 v1(56.5,40)
NetU3_3: U3.3 U3.4 | length 6.4
  Top Layer w0.5: U3.3 58.96,42.04 59.5,41.5 60.5,41.5 61,42 61.366,42.366 61.366,43.746 U3.4
NetU3_5: U3.5 U3.8 | length 35.2
  Top Layer w0.5: v1(64,41) 64.019,41.019 64.019,43.859 U3.5 ; U3.8 69.12,52.337 69.981,53.198 69.981,53.481 v1(70,53.5)
  Bottom Layer w0.5: v1(64,41) 66,39 71.5,39 73,40.5 73,54 71,56 70.5,56 70,55.5 v1(70,53.5)
NetU3_10: U3.10 U3.11 | length 6.9
  Top Layer w0.5: U3.11 61.5,53.5 62,54 63.5,54 64.04,53.46 U3.10
VCC: C1.1 J2.1 Q1.1 Q2.1 R1.2 R2.2 R5.2 R11.2 U1.1 U2.8 | length 434.1
  Top Layer w0.5: J2.1 7.5,67.54 7.5,74 ; v1(11,77.5) 7.5,74 ; v1(27,77.5) 38,77.5 39.5,76 39.5,70.227 ; R1.2 39,119.127 36.5,121.627 ; R11.2 39.5,70.227 ; v1(42,68) 39.773,70.227 39.5,70.227 ; C1.1 45.5,116.627 40.5,121.627 ; U1.1 40.5,121.627 ; v1(48,62) 48,61.973 48.314,61.659 U2.8 ; R5.2 65,121 61,125 ; R2.2 104.5,122 101.5,125 ; Q1.1 125.5,120.5 121,125 ; Q2.1 141,120.5 136.5,125 121,125 ; 7.5,74 7.5,104.5 24.627,121.627 36.5,121.627 ; 36.5,121.627 38.627,121.627 ; 38.627,121.627 40.5,121.627 ; 38.627,121.627 42,125 61,125 ; 61,125 101.5,125 ; 101.5,125 121,125
  Bottom Layer w0.5: v1(11,77.5) v1(27,77.5) ; v1(42,68) v1(48,62)
VDD: J3.1 R16.1 | length 21.4
  Top Layer w0.5: J3.1 89,8.5 90,9.5 R16.1
pads on no net: U4.3 U4.4 U4.5 U4.6 U4.8 U4.9 U4.10 U4.11 U4.12 U4.13

## Silkscreen, mask and mechanical layers (free items; w line width, h text height)
Top Overlay:
  text "IITRMS" at 152.5,87.5 h8 r90
  text "RITVIK" at 147.189,15 h8 r90
  text "MAHAJAN" at 152.167,10 h8 r90
Board Outline:
  the board outline again, w0.2

## Text inside footprints (layer, text, board x,y; h text height)
J1: Top Overlay "1" at 153.936,56.532 h1.52
J2: Top Overlay "1" at 2.936,66.532 h1.52
J3: Top Overlay "1" at 86.492,12.564 h1.52 r270